# EAGLE board Select Fire Rapidstrike (EAGLE 9.1.0)
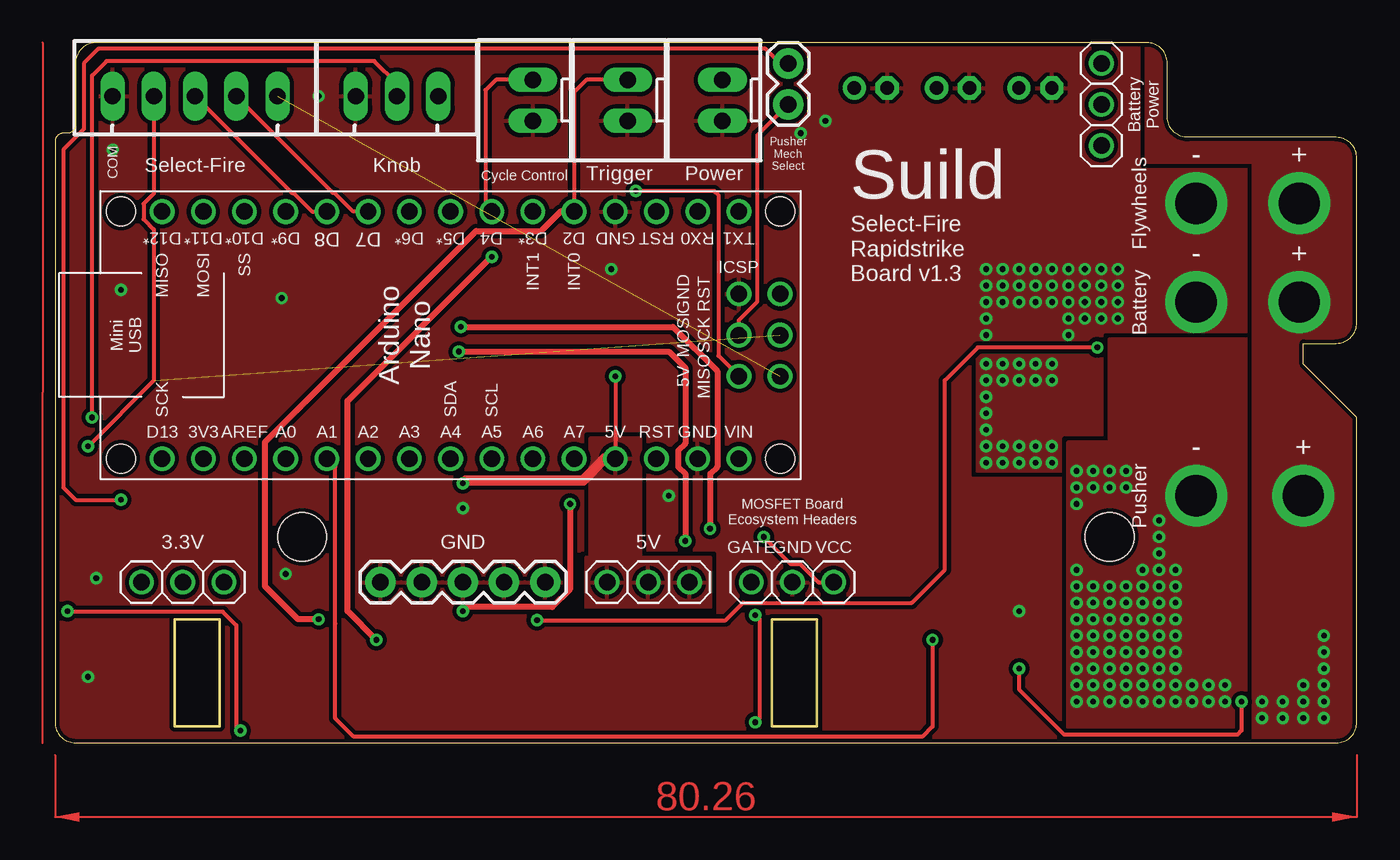
[diagram p0: board, top side]
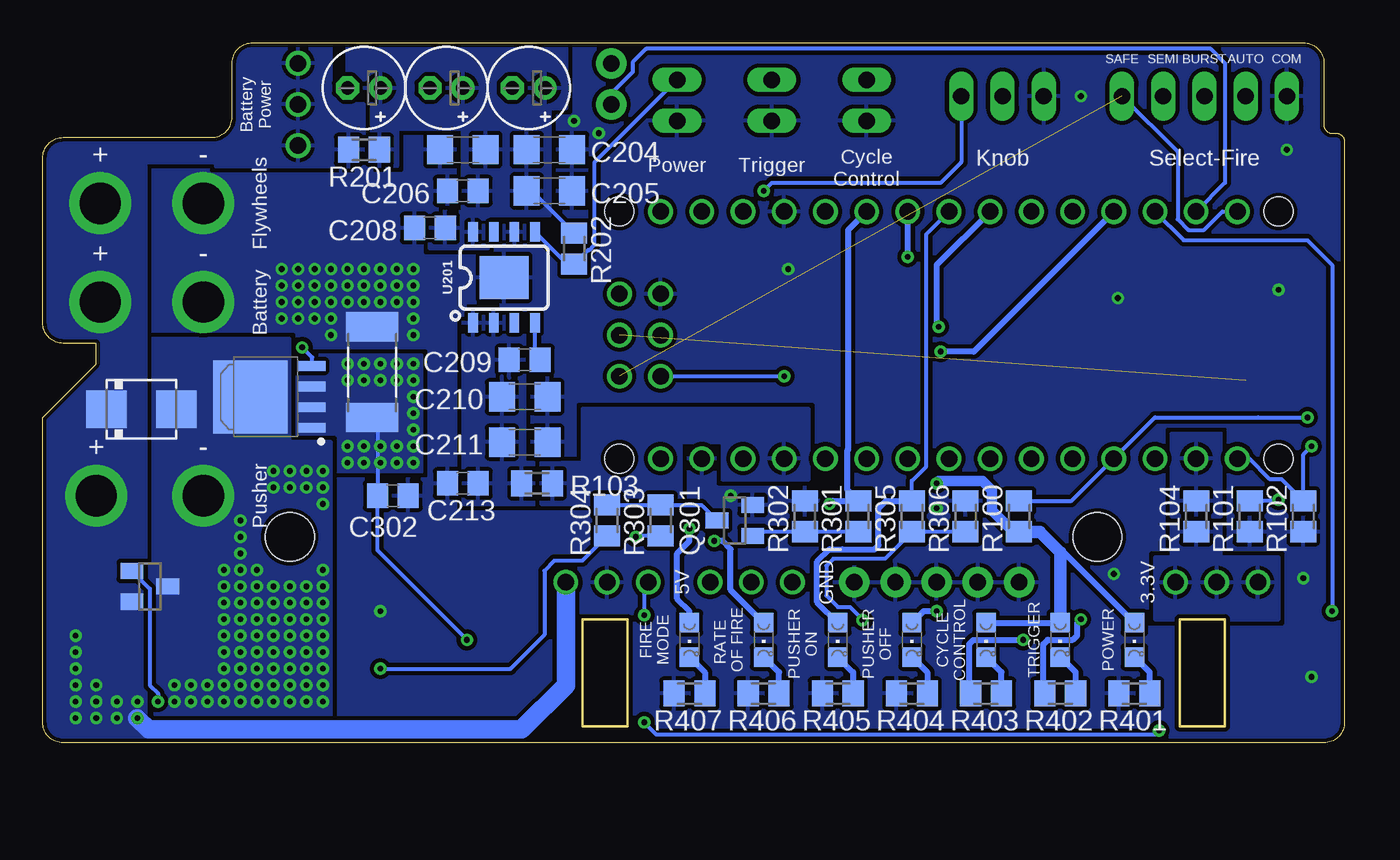
[diagram p1: board, bottom side, seen from below]

Size 80.26 x 43.18 mm. Coordinates in mm from the lower left corner, seen from the top.
Outline: 0.76,37.59 0.51,37.59 arc90 0,37.08 0,1.27 arc90 1.27,0 78.99,0 arc90 80.26,1.27 80.26,20.07 76.96,23.37 76.96,24.64 78.99,24.64 arc90 80.26,25.91 80.26,36.07 arc90 78.99,37.34 69.85,37.34 arc-90 68.58,38.61 68.58,41.91 arc90 67.31,43.18 2.54,43.18 arc90 1.27,41.91 1.27,38.1 arc-90 0.76,37.59
Outline: 7.37,7.62 10.16,7.62 10.16,1.02 7.37,1.02 7.37,7.62
Outline: 44.2,7.62 46.99,7.62 46.99,1.02 44.2,1.02 44.2,7.62
Copper layers (1*16): Top 0.035mm / dielectric 1.5mm / Bottom 0.035mm
Design rules "default *": minimum track width 10mil, minimum drill 0.35mm, track to track 10mil, track to pad 10mil, pad to pad 10mil, via to via 10mil, smd to smd 10mil, copper to edge 10mil, drill to drill 10mil, minimum pad ring 10mil, minimum via ring 8mil, stop-mask expansion 4mil, vias tented up to drill 30mil, thermal gap 10mil
Net classes: 1 BATT_POWER: width 0.254 mm

## Footprints (pad centres in the part's own frame; a part is rotated, then mirrored left to right if it is on the bottom)
E2-5 = drill 0.813 pad 1.422: + -1.016,0 | drill 0.813 pad 1.422 octagon: - 1.016,0
C1206 = smd 1.6 x 1.8: 1 -1.4,0; 2 1.4,0
C0805 = smd 1.3 x 1.5: 1 -0.95,0; 2 0.95,0
DO214AA = smd 2.5 x 2.3: A 2.15,0; C -2.15,0
CHIPLED_0805 = smd 1.2 x 1.2: A 0,-1.05; C 0,1.05
MOUNT-HOLE-2.5MM = drill 2.54 pad 3.81: P$1 0,0
UNPLATED_MOUNT_HOLE_3MM = hole 3: 0,0
JST-XH-02-PACKAGE-LONG-PAD = drill 1.016 long: 1 -1.27,0; 2 1.27,0
JST-XH-03-PACKAGE-LONG-PAD = drill 1.016 long: 1 -2.54,0; 2 0,0; 3 2.54,0
JST-XH-05-PACKAGE-LONG-PAD = drill 1.016 long: 1 -5.08,0; 2 -2.54,0; 3 0,0; 4 2.54,0; 5 5.08,0
1X02 = drill 1.016 pad 1.88: 1 0,0; 2 2.54,0
1X03 = drill 1.016: 1 -2.54,0; 2 0,0; 3 2.54,0
1X05 = drill 1.016 pad 1.88: 1 0,0; 2 2.54,0; 3 5.08,0; 4 7.62,0; 5 10.16,0
SOT23 = smd 1 x 1.4: 1 -0.95,-1.1; 2 0.95,-1.1; 3 0,1.1
SOT-23 = smd 1 x 1.4: 1 -0.95,-1.1; 2 0.95,-1.1; 3 0,1.1
TO127P600X120-5N = smd 1.65 x 0.6: 1 -2.65,1.905; 2 -2.65,0.635; 3 -2.65,-0.635; 4 -2.65,-1.905 | smd 4.6 x 4.5: 5 1.15,0
M0805 = smd 1.3 x 1.6: 1 -0.95,0; 2 0.95,0
R2512 = smd 1.8 x 3.2: 1 -2.8,0; 2 2.8,0
ARDUINO_NANO = drill 1.016: P1 -7.62,16.51; P2 -7.62,13.97; P3 -7.62,11.43; P4 -7.62,8.89; P5 -7.62,6.35; P6 -7.62,3.81; P7 -7.62,1.27; P8 -7.62,-1.27; P9 -7.62,-3.81; P10 -7.62,-6.35; P11 -7.62,-8.89; P12 -7.62,-11.43; P13 -7.62,-13.97; P14 -7.62,-16.51; P15 -7.62,-19.05; P16 7.62,-19.05; P17 7.62,-16.51; P18 7.62,-13.97; P19 7.62,-11.43; P20 7.62,-8.89; P21 7.62,-6.35; P22 7.62,-3.81; P23 7.62,-1.27; P24 7.62,1.27; P25 7.62,3.81; P26 7.62,6.35; P27 7.62,8.89; P28 7.62,11.43; P29 7.62,13.97; P30 7.62,16.51; P31 -2.54,19.05; P32 -2.54,16.51; P33 0,19.05; P34 0,16.51; P35 2.54,19.05; P36 2.54,16.51 | hole 1.778: -7.62,19.05; 7.62,19.05; -7.62,-21.59; 7.62,-21.59
PG-DSO-8 = smd 0.6 x 1.2: 1 -1.905,-2.8; 2 -0.635,-2.8; 3 0.635,-2.8; 4 1.905,-2.8; 5 1.905,2.8; 6 0.635,2.8; 7 -0.635,2.8; 8 -1.905,2.8 | smd 2.997 x 2.642: BODY 0,0

## Placement (x,y rotation side)
C201  47uF  [E2-5]  60.45,40.39 180 bottom
C202  47uF  [E2-5]  55.37,40.39 180 bottom
C203  47uF  [E2-5]  50.29,40.39 180 bottom
C204  10uF  [C1206]  49.02,36.58 0 bottom
C205  10uF  [C1206]  49.02,34.04 0 bottom
C206  1uF  [C0805]  54.36,34.04 180 bottom
C207  10uF  [C1206]  54.36,36.58 180 bottom
C208  0.1uF  [C0805]  56.39,31.75 180 bottom
C209  10nF  [C0805]  50.55,23.62 0 bottom
C210  10uF  [C1206]  50.55,21.34 0 bottom
C211  10uF  [C1206]  50.55,18.54 0 bottom
C213  0.1uF  [C0805]  54.36,16 180 bottom
C302  0.1uF  [C0805]  58.67,15.24 0 bottom
D301  [DO214AA]  74.17,20.57 0 bottom
DS401  LTST-C171GKT  [CHIPLED_0805]  12.95,6.35 180 bottom
DS402  LTST-C171GKT  [CHIPLED_0805]  17.53,6.35 180 bottom
DS403  LTST-C171GKT  [CHIPLED_0805]  22.1,6.35 180 bottom
DS404  LTST-C170AKT  [CHIPLED_0805]  26.67,6.35 180 bottom
DS405  LTST-C170AKT  [CHIPLED_0805]  31.24,6.35 180 bottom
DS406  LTST-C171TBKT  [CHIPLED_0805]  35.81,6.35 180 bottom
DS407  LTST-C171KSKT  [CHIPLED_0805]  40.39,6.35 180 bottom
H1  B+  [MOUNT-HOLE-2.5MM]  76.71,33.27 0 top
H2  B-  [MOUNT-HOLE-2.5MM]  70.36,27.18 0 top
H3  M+  [MOUNT-HOLE-2.5MM]  76.96,15.24 0 bottom
H4  M+  [MOUNT-HOLE-2.5MM]  70.36,33.27 0 top
H0205  UNPLATED_MOUNT_HOLE_3MM  [UNPLATED_MOUNT_HOLE_3MM]  65.02,12.7 0 top
H0206  UNPLATED_MOUNT_HOLE_3MM  [UNPLATED_MOUNT_HOLE_3MM]  15.24,12.7 0 top
H0301  M+  [MOUNT-HOLE-2.5MM]  76.71,27.18 0 top
H308  M-  [MOUNT-HOLE-2.5MM]  70.36,15.24 0 top
J2  POWER  [JST-XH-02-PACKAGE-LONG-PAD]  41.15,39.62 90 top
J3  POT  [JST-XH-03-PACKAGE-LONG-PAD]  21.08,39.88 0 top
J4  TRIGGER  [JST-XH-02-PACKAGE-LONG-PAD]  35.31,39.62 90 top
J5  CYCLE CONTROL  [JST-XH-02-PACKAGE-LONG-PAD]  29.46,39.62 90 top
J6  SELECT FIRE  [JST-XH-05-PACKAGE-LONG-PAD]  8.64,39.88 0 top
J7  PUSHER MECH SEL  [1X02]  45.21,41.91 270 top
J8  [1X03]  45.47,9.91 180 top
J0206  [1X03]  64.52,39.37 270 top
J0208  [1X03]  36.58,9.91 180 top
J0209  [1X03]  7.87,9.91 0 top
J0210  [1X05]  20.07,9.91 0 top
Q301  T2N7002AK  [SOT23]  37.59,13.72 90 bottom
Q302  SSM3J358RLFCT-ND  [SOT-23]  73.66,9.65 270 bottom
Q303  PSMN1R5-30YLC  [TO127P600X120-5N]  66.29,21.34 180 bottom
R100  100k  [M0805]  20.07,13.97 270 bottom
R101  10k  [M0805]  5.84,13.97 90 bottom
R102  2.2k  [M0805]  2.54,13.97 90 bottom
R103  0  [M0805]  49.78,16 0 bottom
R104  0  [M0805]  9.14,13.97 270 bottom
R201  0  [M0805]  60.45,36.58 0 bottom
R202  10k  [M0805]  47.5,30.48 90 bottom
R301  100  [M0805]  29.97,13.97 270 bottom
R302  2.2k  [M0805]  33.27,13.97 270 bottom
R303  2.2k  [M0805]  42.16,13.72 270 bottom
R304  100  [M0805]  45.47,13.72 270 bottom
R305  100  [M0805]  26.67,13.97 270 bottom
R306  2.2k  [M0805]  23.37,13.97 270 bottom
R307  0.01  [R2512]  59.94,22.86 270 bottom
R401  150  [M0805]  12.95,3.05 0 bottom
R402  150  [M0805]  17.53,3.05 0 bottom
R403  150  [M0805]  22.1,3.05 0 bottom
R404  300  [M0805]  26.67,3.05 0 bottom
R405  300  [M0805]  31.24,3.05 0 bottom
R406  165  [M0805]  35.81,3.05 0 bottom
R407  150  [M0805]  40.39,3.05 0 bottom
U2  ARDUINO_NANO  [ARDUINO_NANO]  25.65,25.15 270 top
U201  IFX1763XEJV50  [PG-DSO-8]  51.82,28.7 0 bottom

## Library data of the parts
C201-C203 J8 J0206 J0208 J0209 Q301 R100-R104 R301-R306 R401-R407 = adafruit
C204 C205 C207 C210 C211 = eagle-ltspice; SPICEMODEL: NONE; SPICEPREFIX: C
C206 C208 C209 C213 C302 = rcl; SPICEPREFIX: C
D301 = s2x_10; MF: Fairchild; MPN: S2A; OC_FARNELL: 1467485; OC_NEWARK: 58K2391
DS401-DS403 = adafruit; COLOR: GREEN
DS404 DS405 = adafruit; COLOR: ORANGE
DS406 = adafruit; COLOR: BLUE
DS407 = adafruit; COLOR: YELLOW
H1-H4 H0205 H0206 H0301 H308 Q303 U2 U201 = my-eagle-lib
J2-J6 = Rembrandt Electronics - JST XH Connectors v1-0
J7 J0210 = SparkFun-Connectors
Q302 = bt_transistor
R201 R202 = adafruit; STUFF: NO STUFF
R307 = adafruit; POWER: 2W

## Nets
CYC_CTRL_IN: J5.2 R403.1 U2.P7
FIRE_MODE_DEBUG_LED: DS407.A U2.P9
GND: C201.- C202.- C203.- C204.2 C205.2 C206.2 C207.2 C208.2 C210.2 C211.2 C213.2 C302.2 H2.P$1 H4.P$1 J2.1 J3.1 J4.1 J5.1 J6.1 J8.2 J0210.1 J0210.2 J0210.3 J0210.4 J0210.5 Q301.2 R101.1 R102.1 R302.1 R306.1 R307.1 R401.1 R404.1 R405.1 R406.1 R407.1 U2.P4 U2.P29 U2.P32 U201.6 U201.BODY
HI_SIDE_FET_BUFF_IN: Q301.1 R301.2 R302.2
HI_SIDE_GATE: Q302.1 R304.2
HI_SIDE_GATE_R: Q301.3 R303.1 R304.1
I_SENSE: C302.1 Q303.1 Q303.2 Q303.3 R307.2 U2.P20
LED_DS401: DS401.C R401.2
LED_DS402: DS402.C R402.2
LED_DS403: DS403.C R403.2
LED_DS404: DS404.C R404.2
LED_DS405: DS405.C R405.2
LED_DS406: DS406.C R406.2
LED_DS407: DS407.C R407.2
LOW_SIDE_GATE: Q303.4 R305.2 R306.2
MOSFET_BOARD_GATE: J8.3 U2.P13
MOTOR_BRAKE: DS404.A R301.1 U2.P6
MOTOR_DRIVE: DS405.A R305.1 U2.P8
POT_IN: J3.2 R100.1 U2.P19
PP3V3_AR: J0209.1 J0209.2 J0209.3 R104.2
PP3V3_AR_R: R104.1 U2.P17
PP5V0_AR: DS401.A DS402.A DS403.A J3.3 J0208.1 J0208.2 J0208.3 R100.2 R103.2 U2.P27 U2.P36
PP5V0_MAIN: C209.1 C210.1 C211.1 C213.1 R103.1 U201.1 U201.2
PP_BATT_MAIN [BATT_POWER]: C201.+ C202.+ C203.+ C204.1 C205.1 C206.1 C207.1 C208.1 R201.2 R202.2 U201.8
PP_BATT_RAW: D301.C H1.P$1 H3.P$1 H0301.P$1 J8.1 J0206.1 J0206.2 J0206.3 Q302.2 R201.1 R303.2
PUSHER_MECH_SEL: J7.2 U2.P14 U2.P34
PUSHER_MECH_SEL_PD: J7.1 R101.2
PUSHER_NEG: D301.A H308.P$1 Q302.3 Q303.5
ROF_DEBUG_LED: DS406.A U2.P12
SEL_FR_<0>: J6.5 U2.P15 U2.P35
SEL_FR_<1>: J6.4 U2.P10
SEL_FR_<2>: J6.3 U2.P11
SEL_FR_<3>: J6.2 R102.2 U2.P16 U2.P33
TRIG_IN: J4.2 R402.1 U2.P5
U201_BYP: C209.2 U201.4
U201_EN: J2.2 R202.1 U201.5

## Tracks (layer width: path | path; a pad name or v marks a point on that pad's centre or on a via)
CYC_CTRL_IN  (via drill 0.35)
  Top 0.254: J5.2 27.18,40.89 26.54,40.26 26.54,33.15 U2.P7
  Top 0.381: v19.81,6.35 18.03,8.13 18.03,21.08 v26.92,29.97
  Bottom 0.381: v19.81,6.35 v19.82,6.34 22.88,6.34 23.14,6.08 23.14,3.5 23.05,3.4 R403.1 | v26.92,29.97 U2.P7
FIRE_MODE_DEBUG_LED  (via drill 0.35)
  Top 0.381: v25.02,25.65 38.1,25.65 40.83,22.92 40.83,17.03 40.39,16.58 v40.39,13.21
  Bottom 0.381: DS407.A 40.39,8.13 41.15,8.89 41.15,11.68 40.39,12.45 v40.39,13.21 | U2.P9 25.15,29.46 25.15,25.65 v25.02,25.65
GND  (via drill 0.35)
  other vias: 57.4,25.15 57.4,28.19 57.4,29.21 57.4,26.16 57.4,27.18 58.42,28.19 58.42,29.21 58.42,27.18 59.44,28.19 59.44,29.21 59.44,27.18 60.45,28.19 60.45,29.21 60.45,27.18 61.47,28.19 61.47,29.21 61.47,27.18 62.48,28.19 62.48,29.21 62.48,27.18 63.5,28.19 63.5,29.21 63.5,27.18 64.52,28.19 64.52,29.21 64.52,27.18 65.53,28.19 65.53,29.21 65.53,27.18 62.48,26.16 62.48,25.15 63.5,26.16 64.52,26.16 65.53,26.16 47.5,38.35 45.97,37.59 25.15,14.48 3.56,36.58 16.26,39.88 4.06,27.94 37.85,15.24 59.44,8.13 2.03,4.06 14.22,10.41 13.97,27.43 34.29,29.21 2.54,10.16
  pour Top (rank 6): -3.56,-3.56 -3.56,48.26 87.88,48.26 87.88,-3.56
  pour Bottom (rank 6): -3.81,48.51 88.14,48.51 88.14,-3.81 -3.81,-3.81
  pour Bottom (rank 6, no thermals): 73.66,24.89 68.07,24.89 63.5,24.89 63.5,23.88 56.9,23.88 56.9,29.72 68.07,29.72 68.07,35.56 73.66,35.56
  pour Top (rank 6, no thermals): 68.07,24.89 73.66,24.89 73.66,35.56 68.07,35.56
HI_SIDE_FET_BUFF_IN
  Bottom 0.254: R301.2 R302.2 36.24,13.02 Q301.1
HI_SIDE_GATE  (via drill 0.35)
  Top 0.254: v73.15,2.54 73.15,0.76 72.9,0.51 62.23,0.51 59.44,3.3 v59.44,4.57
  Bottom 0.254: Q302.1 73.66,9.5 73.66,3.56 73.15,3.05 v73.15,2.54 | R304.2 46.99,11.24 48.7,11.24 49.33,10.62 49.33,6.66 51.42,4.57 v59.44,4.57
HI_SIDE_GATE_R
  Bottom 0.254: Q301.3 39.64,14.67 R303.1 R304.1
I_SENSE  (via drill 0.35)
  Top 0.254: U2.P20 17.27,17.02 17.27,7.37 17.27,1.52 18.42,0.38 53.47,0.38 54.1,1.02 v54.1,6.35
  Bottom 0.254: 54.36,6.6 v54.1,6.35 59.62,11.87 C302.1 59.62,19.74 R307.2
  other vias: 60.45,17.27 61.47,17.27 58.42,17.27 59.44,17.27 57.4,19.3 57.4,20.32 57.4,17.27 57.4,18.29 60.45,18.29 61.47,18.29 58.42,18.29 59.44,18.29 57.4,23.37 57.4,21.34 57.4,22.35 60.45,22.35 61.47,22.35 58.42,22.35 59.44,22.35 60.45,23.37 61.47,23.37 58.42,23.37 59.44,23.37
  pour Bottom (rank 3, no thermals): 56.9,23.88 65.02,23.88 65.02,18.54 62.48,18.54 62.48,16.76 56.9,16.76
  pour Top (rank 3, no thermals): 56.9,23.88 65.02,23.88 65.02,18.54 62.48,18.54 62.48,16.76 56.9,16.76
LED_DS401
  Bottom 0.381: R401.2 12,4.35 DS401.C
LED_DS402
  Bottom 0.381: R402.2 16.58,4.35 DS402.C
LED_DS403
  Bottom 0.381: R403.2 21.15,4.35 DS403.C
LED_DS404
  Bottom 0.381: DS404.C 25.72,4.35 R404.2
LED_DS405
  Bottom 0.381: DS405.C 30.29,4.35 R405.2
LED_DS406
  Bottom 0.381: R406.2 34.86,4.35 DS406.C
LED_DS407
  Bottom 0.381: DS407.C 39.44,4.35 R407.2
LOW_SIDE_GATE  (via drill 0.35)
  Top 0.254: v64.26,24.38 56.9,24.38 54.86,22.35 54.86,10.67 52.83,8.64 42.42,8.64 41.34,7.56 v29.72,7.56
  Bottom 0.254: Q303.4 63.64,23.77 v64.26,24.38 | 23.3,12.95 R306.2 R305.2 28.34,11.35 31.51,11.35 31.94,10.92 31.94,9.08 31.24,8.38 30.48,8.38 29.72,7.62 v29.72,7.56
MOSFET_BOARD_GATE  (via drill 0.35)
  Top 0.254: v0.76,8.13 0.81,8.08 10.35,8.08 11.18,7.25 11.18,1.02 v11.43,0.76 | v43.18,1.27 43.43,1.52 43.43,7.62 v43.18,7.87
  Bottom 0.254: U2.P13 9.91,30.99 2.29,30.99 0.76,29.46 v0.76,8.13 | J8.3 43.18,9.65 v43.18,7.87 | v11.43,0.76 11.68,0.51 42.42,0.51 v43.18,1.27
MOTOR_BRAKE  (via drill 0.35)
  Top 0.381: v31.75,14.73 31.75,9.47 30.66,8.38 25.4,8.38 v25.15,8.13
  Bottom 0.381: U2.P6 30.61,31.62 30.61,18.8 30.61,18.09 30.67,18.03 30.67,15.62 R301.1 31.56,14.92 v31.75,14.73 | v25.15,8.13 25.94,8.13 DS404.A
MOTOR_DRIVE
  Bottom 0.254: U2.P8 25.78,31.37 25.78,17.05 26.67,16.16 R305.1
  Bottom 0.381: DS405.A 32.51,8.67 32.51,11.18 31.75,11.94 30.97,11.94 30.96,11.92 28.99,11.92 28.73,12.19 28.73,14.45 28.26,14.92 R305.1
POT_IN  (via drill 0.35)
  Top 0.254: J3.2 21.08,40.64 19.69,42.04 3.17,42.04 2.29,41.15 v2.29,20.07
  Bottom 0.254: v2.29,20.07 5.33,20.07 11.68,20.07 U2.P19 16.83,14.92 R100.1
PP3V3_AR
  pour Bottom (rank 2): 10.67,11.43 11.68,11.43 11.68,7.62 4.06,7.62 4.06,11.43 7.62,11.43 7.62,13.97 10.67,13.97
PP3V3_AR_R
  pour Bottom: 7.62,13.97 7.62,19.05 10.67,19.05 10.67,13.97
PP5V0_AR  (via drill 0.35)
  Top 0.254: v35.81,34.04 40.64,34.04 40.89,33.78 40.89,23.88 U2.P36 | v34.54,22.61 U2.P27
  Top 0.635: v25.15,16 25.34,16.19 32.56,16.19 33.89,17.53 U2.P27
  Bottom 0.254: J3.3 23.62,35.81 24.89,34.54 35.31,34.54 v35.81,34.04 | U2.P36 v34.54,22.61
  Bottom 0.381: DS403.A DS402.A | DS401.A 17.31,11.75 17.53,11.75
  Bottom 0.635: v25.15,16 25.01,16.14 22.33,16.14 21.74,15.55 21.74,14.34 20.42,13.02 R100.2
  Bottom 0.762: DS402.A 17.53,11.75 18.79,13.02 R100.2
  pour Top (rank 2): 40.39,8.38 32.77,8.38 32.77,11.43 33.02,11.43 33.02,18.8 36.07,18.8 36.07,11.43 40.39,11.43
  pour Bottom (rank 3): 43.94,20.57 46.99,20.57 46.99,17.27 49.53,17.27 49.53,14.73 40.89,14.73 40.89,18.54 38.35,18.54 38.35,16.26 33.02,16.26 33.02,20.57
PP5V0_MAIN
  pour Bottom (rank 4): 50.55,26.67 54.36,26.67 54.36,14.73 50.55,14.73 49.78,14.73 49.78,17.27 50.55,17.27
PP_BATT_MAIN
  Bottom 0.254: R202.2 50.1,34.04 C205.1
  pour Bottom (rank 2): 59.94,37.85 59.94,39.88 60.45,39.88 60.45,40.89 60.96,41.4 61.47,41.4 61.47,44.2 48.01,44.2 48.01,39.12 49.02,39.12 49.02,32.51 52.83,32.51 52.83,30.48 54.36,30.48 56.39,30.48 56.39,32.77 54.36,32.77 54.36,37.85 58.42,37.85 58.42,35.56 59.94,35.56
PP_BATT_RAW  (via drill 0.35)
  Top 0.254: v43.69,12.7 45.34,11.05 45.94,11.05 47.08,9.91 J8.1
  Bottom 0.254: R303.2 43.62,12.77 v43.69,12.7
  Bottom 1.143: v74.42,1.52 73.72,0.82 50.74,0.82 48.01,3.56 J8.1
  other vias: 78.23,6.6 78.23,5.59 78.23,4.57 78.23,3.56 78.23,2.54 78.23,1.52 76.96,3.56 76.96,2.54 76.96,1.52 75.69,2.54 75.69,1.52 74.42,2.54
  pour Bottom: 62.48,46.74 69.6,46.74 69.6,35.56 60.45,35.56 60.45,39.37 61.72,39.37 62.48,40.13
  pour Bottom (no thermals): 84.07,46.74 84.07,-2.79 73.91,-2.79 73.91,35.81 67.31,35.81 67.31,46.74
  pour Top (no thermals): 67.31,46.74 84.07,46.74 84.07,-2.79 73.91,-2.79 73.91,35.81 67.31,35.81
PUSHER_MECH_SEL
  Top 0.254: J7.2 43.31,37.47 43.31,27.21 42.16,26.07 U2.P34
  Bottom 0.254: U2.P14 7.37,34.54 7.37,41.91 8.25,42.8 43.05,42.8 43.89,41.96 43.89,41.36 45.21,40.04 J7.2
PUSHER_MECH_SEL_PD  (via drill 0.35)
  Top 0.254: J7.1 44.7,41.91 43.81,42.8 2.67,42.8 1.78,41.91 1.78,37.85 0.51,36.58 0.51,15.75 | 0.51,15.75 | 0.51,15.75 1.27,14.99 v4.06,14.99
  Bottom 0.254: v4.06,14.99 4.13,14.92 R101.2
PUSHER_NEG  (via drill 0.35)
  other vias: 68.07,9.65 68.07,12.7 68.07,10.67 67.06,9.65 67.06,10.67 66.04,9.65 68.07,11.68 64.01,16.76 62.99,16.76 62.99,15.75 64.01,15.75 66.04,15.75 66.04,16.76 65.02,16.76 65.02,15.75 68.07,13.72 67.06,8.64 68.07,7.62 68.07,8.64 67.06,7.62 66.04,8.64 66.04,7.62 68.07,6.6 68.07,5.59 66.04,5.59 66.04,6.6 67.06,6.6 67.06,5.59 65.02,9.65 64.01,9.65 62.99,9.65 64.01,8.64 65.02,7.62 65.02,8.64 64.01,7.62 62.99,8.64 62.99,7.62 65.02,6.6 65.02,5.59 62.99,5.59 62.99,6.6 64.01,6.6 64.01,5.59 68.07,4.57 66.04,4.57 67.06,4.57 65.02,4.57 62.99,4.57 64.01,4.57 69.09,7.62 69.09,5.59 69.09,6.6 69.09,4.57 69.09,9.65 69.09,10.67 69.09,8.64 62.99,10.67 62.99,14.73 70.1,3.56 70.1,2.54 71.12,3.56 71.12,2.54 68.07,3.56 66.04,3.56 67.06,3.56 65.02,3.56 62.99,3.56 64.01,3.56 68.07,2.54 66.04,2.54 67.06,2.54 65.02,2.54 62.99,2.54 64.01,2.54 69.09,3.56 69.09,2.54 72.14,3.56 72.14,2.54
  pour Bottom (rank 2, no thermals): 73.66,24.89 73.66,-2.54 65.02,-2.54 62.48,-2.54 62.48,18.54 65.02,18.54 65.02,24.89
  pour Top (rank 2, no thermals): 73.66,24.89 73.66,-2.54 65.02,-2.54 62.48,-2.54 62.48,18.54 65.02,18.54 65.02,24.89
ROF_DEBUG_LED  (via drill 0.35)
  Top 0.381: v24.89,24.13 37.85,24.13 38.86,23.11 38.86,18.47 38.42,18.03 38.42,17.03 38.86,16.58 v38.86,12.45
  Bottom 0.381: DS406.A 37.85,9.43 37.85,11.94 38.35,12.45 v38.86,12.45 | U2.P12 22.86,24.13 v24.89,24.13
SEL_FR_<0>  (1 unrouted)
  Bottom 0.254: J6.5 10.29,36.45 10.29,32.29 9.62,31.62 8.67,31.62 7.53,32.77 U2.P15
SEL_FR_<1>
  Top 0.254: U2.P10 18.38,32.77 17.24,33.91 17.14,33.91 J6.4
SEL_FR_<2>
  Top 0.254: J6.3 14.61,33.91 14.7,33.91 15.84,32.77 U2.P11
SEL_FR_<3>  (via drill 0.35)  (1 unrouted)
  Top 0.254: 6.1,39.02 J6.2 6.1,33.87 5.46,33.24 5.46,32.29 6.1,31.66 6.1,22.35 v2.03,18.29
  Bottom 0.254: v2.03,18.29 2.54,17.78 R102.2 3.88,16.26 4.59,16.26 5.86,17.53 U2.P16
TRIG_IN  (via drill 0.35)
  Top 0.254: J4.2 32.77,40.89 32,40.13 U2.P5
  Top 0.381: U2.P5 31.17,32.77 29.96,31.56 25.97,31.56 12.95,18.54 12.95,9.65 14.99,7.62 v16.26,7.62
  Bottom 0.381: v16.26,7.62 16.48,7.39 16.48,6.62 16.74,6.36 18.3,6.36 18.57,6.08 18.57,3.14 R402.1
U201_BYP
  Bottom 0.254: C209.2 49.91,23.94 U201.4
U201_EN
  Bottom 0.254: U201.5 47.94,29.53 R202.1 46.63,30.4 46.54,30.4 46.23,30.71 46.23,35.81 J2.2
(copper drawn outside any net)
  shapes: Top area x2

## Text on the board
tNames: Battery / Power | Pusher / Mech / Select | COM | - | + | Select-Fire | Knob | Cycle Control | Trigger | Power | Suild | Flywheels | - | + | Select-Fire / Rapidstrike / Board v1.3 | Battery | - | + | Pusher | MOSFET Board / Ecosystem Headers | 3.3V | GND | 5V | GATE | GND | VCC
bNames: COM | AUTO | BURST | SEMI | SAFE | Battery / Power | Select-Fire | Knob | Cycle / Control | - | + | Trigger | Power | Flywheels | - | + | Battery | - | + | Pusher | 3.3V | GND | 5V | POWER | TRIGGER | CYCLE / CONTROL | RATE / OF FIRE | FIRE / MODE | PUSHER / OFF | PUSHER / ON